# EAGLE board CT_schematic (EAGLE 7.6.0)

Size 100 x 80 mm. Coordinates in mm from the lower left corner, seen from the top.
Outline: 0,0 100,0 100,80 0,80 0,0
Copper layers (1*16): Top 0.035mm / dielectric 1.5mm / Bottom 0.035mm
Design rules "default": minimum track width 10mil, minimum drill 24mil, track to track 8mil, track to pad 8mil, pad to pad 8mil, via to via 8mil, smd to smd 8mil, copper to edge 40mil, drill to drill 8mil, minimum pad ring 10mil, minimum via ring 8mil, stop-mask expansion 4mil, vias tented up to drill 0mil, thermal gap 10mil

## Footprints (pad centres in the part's own frame; a part is rotated, then mirrored left to right if it is on the bottom)
C0603 = smd 0.8 x 0.8: 1 -0.762,0; 2 0.762,0
C0402 = smd 0.5 x 0.5: 1 -0.508,0; 2 0.508,0
C0805 = smd 1.2 x 1.3: 1 -1.016,0; 2 1.016,0
EXV-9B = smd 2.718 x 1.778: 1 -2.108,0; 2 2.108,0
C1206 = smd 1.3 x 1.6: 1 -1.524,0; 2 1.524,0
C1210 = smd 1.2 x 2.5: 1 -1.524,0; 2 1.524,0
EXV-9H = smd 3.505 x 1.676: 1 -2.857,0; 2 2.857,0
PJ-037B_PACKAGE = drill 3.7 square: 1 12,0 | drill 3.2 square: 2 6,0
R0603 = smd 0.8 x 0.8: 1 -0.762,0; 2 0.762,0
WLCSP49 = smd 0.25 x 0.25: A1 -1.2,1.2; A2 -0.8,1.2; A3 -0.4,1.2; A4 0,1.2; A5 0.4,1.2; A6 0.8,1.2; A7 1.2,1.2; B1 -1.2,0.8; B2 -0.8,0.8; B3 -0.4,0.8; B4 0,0.8; B5 0.4,0.8; B6 0.8,0.8; B7 1.2,0.8; C1 -1.2,0.4; C2 -0.8,0.4; C3 -0.4,0.4; C4 0,0.4; C5 0.4,0.4; C6 0.8,0.4; C7 1.2,0.4; D1 -1.2,0; D2 -0.8,0; D3 -0.4,0; D4 0,0; D5 0.4,0; D6 0.8,0; D7 1.2,0; E1 -1.2,-0.4; E2 -0.8,-0.4; E3 -0.4,-0.4; E4 0,-0.4; E5 0.4,-0.4; E6 0.8,-0.4; E7 1.2,-0.4; F1 -1.2,-0.8; F2 -0.8,-0.8; F3 -0.4,-0.8; F4 0,-0.8; F5 0.4,-0.8; F6 0.8,-0.8; F7 1.2,-0.8; G1 -1.2,-1.2; G2 -0.8,-1.2; G3 -0.4,-1.2; G4 0,-1.2; G5 0.4,-1.2; G6 0.8,-1.2; G7 1.2,-1.2
SSOP-28 = smd 1.5 x 0.4: 1 -3.625,4.225; 2 -3.625,3.575; 3 -3.625,2.925; 4 -3.625,2.275; 5 -3.625,1.625; 6 -3.625,0.975; 7 -3.625,0.325; 8 -3.625,-0.325; 9 -3.625,-0.975; 10 -3.625,-1.625; 11 -3.625,-2.275; 12 -3.625,-2.925; 13 -3.625,-3.575; 14 -3.625,-4.225; 15 3.625,-4.225; 16 3.625,-3.575; 17 3.625,-2.925; 18 3.625,-2.275; 19 3.625,-1.625; 20 3.625,-0.975; 21 3.625,-0.325; 22 3.625,0.325; 23 3.625,0.975; 24 3.625,1.625; 25 3.625,2.275; 26 3.625,2.925; 27 3.625,3.575; 28 3.625,4.225
FCI_10118193-0001LF = smd 0.4 x 1.35: 1 -1.3,2.675; 2 -0.65,2.675; 3 0,2.675; 4 0.65,2.675; 5 1.3,2.675 | smd 1.6 x 1.4: 6 -3.2,2.45; 7 3.2,2.45 | smd 1.9 x 1.9: 8 -1.2,0; 9 1.2,0 | hole 0.5: -3.3,0; 3.3,0
SAMTEC_FTSH-105-01-L-DV-K = smd 0.762 x 2.794: 1 -2.54,-2.032; 2 -2.54,2.032; 3 -1.27,-2.032; 4 -1.27,2.032; 5 0,-2.032; 6 0,2.032; 7 1.27,-2.032; 8 1.27,2.032; 9 2.54,-2.032; 10 2.54,2.032
WFDN-8 = smd 0.48 x 0.7: 1 0,0; 2 1.27,0; 3 2.54,0; 4 3.81,0; 5 3.81,4.45; 6 2.54,4.45; 7 1.27,4.45; 8 0,4.45 | smd 4 x 3: 9 1.89,2.25
VQFN-16 = smd 1.105 x 0.381: 1 -1.822,0.975; 2 -1.822,0.325; 3 -1.822,-0.325; 4 -1.822,-0.975; 9 1.822,-0.975; 10 1.822,-0.325; 11 1.822,0.325; 12 1.822,0.975 | smd 0.381 x 1.105: 5 -0.975,-1.822; 6 -0.325,-1.822; 7 0.325,-1.822; 8 0.975,-1.822; 13 0.975,1.822; 14 0.325,1.822; 15 -0.325,1.822; 16 -0.975,1.822
HTSS-105-01-G-D = drill 1 pad 1.8 square: 1 0,0 | drill 1 pad 1.8: 2 0,2.54; 3 2.54,0; 4 2.54,2.54; 5 5.08,0; 6 5.08,2.54; 7 7.62,0; 8 7.62,2.54; 9 10.16,0; 10 10.16,2.54
ABS07-32.768KHZ-7-T = smd 1.1 x 2.4: 1 -2.5,0; 2 0,0
ABLS-25.000MHZ-B2F-T = smd 5.6 x 2.8: 1 -3.81,0; 2 5.69,0
ABLS-12.000MHZ-B4-T = smd 5.6 x 2.8: 1 0,0; 2 9.5,0
LP2954 = smd 1.6 x 0.6: 1 -2.475,1.905 | smd 1.55 x 0.6: 2 -2.475,0.635; 3 -2.475,-0.635; 4 -2.475,-1.905; 5 2.475,-1.905; 6 2.475,-0.635; 7 2.475,0.635; 8 2.475,1.905
WSON-8 = smd 0.3 x 0.6: 1 -0.75,0; 2 0.05,0; 3 0.85,0; 4 1.65,0; 5 1.65,3.8; 6 0.85,3.8; 7 0.05,3.8; 8 -0.75,3.8 | smd 3 x 2.6: PAD 0.45,1.9
SON-6 = smd 0.55 x 0.3: 1 -0.355,0.5 | smd 0.52 x 0.3: 2 -0.37,0; 3 -0.37,-0.5; 4 0.37,-0.5; 5 0.37,0; 6 0.37,0.5
SW_4-1437565-2 = smd 1.4 x 2.1: 1 -2.23,4.55; 2 -2.23,-4.55; 3 2.23,4.55; 4 2.23,-4.55
LGM67K-G1J2-24-Z = smd 0.8 x 1.4: A -2,0; C 0,0
NC7SZ125M5X = smd 1.3 x 0.7: 1 -1.3,0.95; 2 -1.3,0; 3 -1.3,-0.95; 4 1.3,-0.95; 5 1.3,0.95
DUMMY_PACKAGE_172 = drill 0.3: 1 0,-1; 2 1.5,-1; 3 3,-1

## Placement (x,y rotation side)
C1  1e-06  [C0603]  -53.34,67.31 0 top  (outside the outline)
C2  1e-07  [C0603]  -57.15,67.31 0 top  (outside the outline)
C3  1e-07  [C0603]  -60.96,67.31 0 top  (outside the outline)
C4  1e-07  [C0603]  -64.77,67.31 0 top  (outside the outline)
C5  1e-07  [C0603]  -68.58,67.31 0 top  (outside the outline)
C6  1e-07  [C0603]  -72.39,67.31 0 top  (outside the outline)
C7  4.7e-06  [C0603]  -49.53,67.31 0 top  (outside the outline)
C8  1e-08  [C0603]  -15.24,72.39 0 top  (outside the outline)
C9  1e-06  [C0603]  -19.05,72.39 0 top  (outside the outline)
C10  1e-07  [C0603]  -22.86,72.39 0 top  (outside the outline)
C11  1e-11  [C0402]  -57.15,72.39 0 top  (outside the outline)
C12  1e-11  [C0402]  -60.96,72.39 0 top  (outside the outline)
C13  1e-11  [C0402]  -64.77,72.39 0 top  (outside the outline)
C14  1e-11  [C0402]  -68.58,72.39 0 top  (outside the outline)
C15  1e-07  [C0402]  -72.39,72.39 0 top  (outside the outline)
C16  4.7e-06  [C0805]  -54.61,55.88 0 top  (outside the outline)
C17  1e-07  [C0402]  -15.24,77.47 0 top  (outside the outline)
C18  1e-07  [C0402]  -19.05,77.47 0 top  (outside the outline)
C19  1e-07  [C0402]  -22.86,77.47 0 top  (outside the outline)
C20  1e-07  [C0402]  -26.67,77.47 0 top  (outside the outline)
C21  1e-07  [C0402]  -30.48,77.47 0 top  (outside the outline)
C22  1e-07  [C0402]  -34.29,77.47 0 top  (outside the outline)
C23  1e-06  [C0603]  -26.67,72.39 0 top  (outside the outline)
C24  1e-06  [EXV-9B]  -25.4,55.88 0 top  (outside the outline)
C25  2.2e-06  [EXV-9B]  -34.29,55.88 0 top  (outside the outline)
C26  1e-08  [C0402]  -38.1,77.47 0 top  (outside the outline)
C27  1e-05  [C1206]  -69.85,48.26 0 top  (outside the outline)
C28  1e-05  [C1210]  -63.5,49.53 0 top  (outside the outline)
C29  1e-07  [C0402]  -41.91,77.47 0 top  (outside the outline)
C30  0.0001  [EXV-9H]  -64.77,31.75 0 top  (outside the outline)
C31  0.0001  [EXV-9H]  -17.78,41.91 0 top  (outside the outline)
C32  1e-08  [C0402]  -45.72,77.47 0 top  (outside the outline)
C33  1e-08  [C0402]  -49.53,77.47 0 top  (outside the outline)
J1  PJ-037B  [PJ-037B_PACKAGE]  -71.12,7.62 0 top  (outside the outline)
R1  10000.0  [R0603]  -40.64,62.23 0 top  (outside the outline)
R2  1000.0  [R0603]  -30.48,72.39 0 top  (outside the outline)
R3  910.0  [R0603]  -34.29,72.39 0 top  (outside the outline)
R4  4700.0  [R0603]  -38.1,72.39 0 top  (outside the outline)
R5  10000.0  [R0603]  -45.72,62.23 0 top  (outside the outline)
R6  4700.0  [R0603]  -41.91,72.39 0 top  (outside the outline)
R7  10000.0  [R0603]  -50.8,62.23 0 top  (outside the outline)
R8  10000.0  [R0603]  -55.88,62.23 0 top  (outside the outline)
R9  10000.0  [R0603]  -60.96,62.23 0 top  (outside the outline)
R10  10000.0  [R0603]  -66.04,62.23 0 top  (outside the outline)
R11  10000.0  [R0603]  -71.12,62.23 0 top  (outside the outline)
R12  10000.0  [R0603]  -15.24,67.31 0 top  (outside the outline)
R13  5.0  [R0603]  -45.72,72.39 0 top  (outside the outline)
R14  100000.0  [R0603]  -59.69,55.88 0 top  (outside the outline)
R15  100000.0  [R0603]  -64.77,55.88 0 top  (outside the outline)
R16  100000.0  [R0603]  -69.85,55.88 0 top  (outside the outline)
R17  10000.0  [R0603]  -20.32,67.31 0 top  (outside the outline)
R18  10000.0  [R0603]  -25.4,67.31 0 top  (outside the outline)
R19  100000.0  [R0603]  -74.93,55.88 0 top  (outside the outline)
R20  100000.0  [R0603]  -15.24,62.23 0 top  (outside the outline)
R21  47000.0  [R0603]  -30.48,67.31 0 top  (outside the outline)
R22  100000.0  [R0603]  -20.32,62.23 0 top  (outside the outline)
R23  100000.0  [R0603]  -25.4,62.23 0 top  (outside the outline)
R24  2231.0  [R0603]  -49.53,72.39 0 top  (outside the outline)
R25  1000.0  [R0603]  -53.34,72.39 0 top  (outside the outline)
R26  10000.0  [R0603]  -35.56,67.31 0 top  (outside the outline)
R27  10000.0  [R0603]  -40.64,67.31 0 top  (outside the outline)
R28  82000.0  [R0603]  -45.72,67.31 0 top  (outside the outline)
R29  300000.0  [R0603]  -30.48,62.23 0 top  (outside the outline)
R30  120000.0  [R0603]  -35.56,62.23 0 top  (outside the outline)
U1  STM32L433CBY6  [WLCSP49]  -24.13,49.53 0 top  (outside the outline)
U2  FT232RL-REEL  [SSOP-28]  -20.32,7.62 0 top  (outside the outline)
U3  10118193-0001LF  [FCI_10118193-0001LF]  -54.61,31.75 0 top  (outside the outline)
U4  FTSH-105-01-L-DV-K  [SAMTEC_FTSH-105-01-L-DV-K]  -49.53,7.62 0 top  (outside the outline)
U5  SST26WF016B-104I/MF  [WFDN-8]  -50.8,19.05 0 top  (outside the outline)
U6  TSC2046IRGVR  [VQFN-16]  -16.51,55.88 0 top  (outside the outline)
U7  HTSS-105-01-G-D  [HTSS-105-01-G-D]  -67.31,19.05 0 top  (outside the outline)
U8  ABS07-32.768KHZ-7-T  [ABS07-32.768KHZ-7-T]  -43.18,49.53 0 top  (outside the outline)
U9  ABLS-25.000MHZ-B2F-T  [ABLS-25.000MHZ-B2F-T]  -36.83,41.91 0 top  (outside the outline)
U10  ABLS-12.000MHZ-B4-T  [ABLS-12.000MHZ-B4-T]  -60.96,41.91 0 top  (outside the outline)
U11  LP2954AIMX/NOPB  [LP2954]  -25.4,33.02 0 top  (outside the outline)
U12  LP3878SDX-ADJ/NOPB  [WSON-8]  -46.99,30.48 0 top  (outside the outline)
U13  TPS3895ADRYR  [SON-6]  -58.42,76.2 0 top  (outside the outline)
U14  4-1437565-2  [SW_4-1437565-2]  -27.94,21.59 0 top  (outside the outline)
U15  Q65110A2395  [LGM67K-G1J2-24-Z]  -52.07,49.53 0 top  (outside the outline)
U16  nc7sz125m5x  [NC7SZ125M5X]  -41.91,55.88 0 top  (outside the outline)
U17  nc7sz125m5x  [NC7SZ125M5X]  -48.26,55.88 0 top  (outside the outline)
U18  Dummy  [DUMMY_PACKAGE_172]  -55.88,77.47 0 top  (outside the outline)

## Library data of the parts
C1-C33 J1 R1-R30 U1-U18 = circuit_tree

## Nets
CLK_CRYSTAL_U1_C6: C11.1 U1.C6 U8.1
CLK_CRYSTAL_U1_C7: C12.1 U1.C7 U8.2
CLK_CRYSTAL_U1_D6: C13.1 U1.D6 U9.1
CLK_CRYSTAL_U1_D7: C14.1 U1.D7 U9.2
CLK_CRYSTAL_U2_27: U2.27 U10.1
CLK_CRYSTAL_U2_28: U2.28 U10.2
GND: C1.2 C2.2 C3.2 C4.2 C5.2 C6.2 C7.2 C8.2 C9.2 C10.2 C11.2 C12.2 C13.2 C14.2 C15.2 C16.2 C17.2 C18.2 C19.2 C20.2 C21.2 C22.2 C23.2 C24.2 C25.2 C26.2 C27.2 C28.2 C29.2 C30.2 C31.2 C32.2 C33.2 J1.2 R2.2 R5.2 R8.2 R12.2 R13.2 R22.2 R25.2 R28.2 R30.2 U1.A6 U1.B1 U1.E7 U1.G2 U2.7 U2.18 U2.21 U2.25 U2.26 U3.5 U3.6 U3.7 U3.8 U3.9 U4.3 U4.5 U5.4 U5.9 U6.10 U7.9 U11.4 U12.3 U12.PAD U13.2 U15.C U16.2 U16.3 U17.1 U17.3 U18.1
NET_U1_A5: R5.1 U1.A5
NET_U1_D5: R4.1 U1.D5 U17.4
NET_U1_G3: R3.1 U1.G3 U15.A
NET_U1_G7: R1.1 U1.G7 U14.3 U14.4
NET_U2_14: R7.1 U2.14
NET_U2_17: C17.1 U2.17
NET_U2_19: R8.1 U2.19
NET_U3_1: R6.1 U3.1
NET_U3_2: U2.16 U3.2
NET_U3_3: U2.15 U3.3
NET_U3_19: R6.2
NET_U4_9: R13.1 U4.9
NET_U6_15: R18.1 U6.15
NET_U7_3: U6.7 U7.3
NET_U7_4: U6.9 U7.4
NET_U7_5: U6.6 U7.5
NET_U7_6: U6.8 U7.6
NET_U11_3: R20.1 U11.3
NET_U11_5: R19.1 U11.5
NET_U11_7: R21.2 R22.1 U11.7
NET_U12_1: C26.1 U12.1
NET_U12_6: R24.2 R25.1 U12.6
NET_U12_8: R23.1 U12.8
NET_U13_1: R27.1 R28.1 U13.1
NET_U13_3: R29.2 R30.1 U13.3
NET_U13_4: R26.1 U13.4 U16.4 U17.2
NET_U14_1: R2.1 U14.1 U14.2
PROC_LPUART1_CTS: U1.E2 U2.3
PROC_LPUART1_RTS: U1.F1 U2.11
PROC_LPUART1_RX: U1.E4 U2.1
PROC_LPUART1_TX: U1.F2 U2.5
PROC_QUADSPI_BK1_IO0: U1.G4 U5.5
PROC_QUADSPI_BK1_IO1: U1.G5 U5.2
PROC_QUADSPI_BK1_IO2: R15.1 U1.F3 U5.3
PROC_QUADSPI_BK1_IO3: R16.1 U1.F4 U5.7
PROC_QUADSPI_BK1_NCS: R14.1 U1.E5 U5.1
PROC_QUADSPI_CLK: U1.E3 U5.6
PROC_SPI1_MISO: U1.A4 U6.16
PROC_SPI1_MOSI: U1.B4 U6.2
PROC_SPI1_NSS: R17.1 U1.G6 U6.3
PROC_SPI1_SCK: U1.F5 U6.4
PROC_SYS_JTCK_SWCLK: R12.1 U1.A2 U4.4
PROC_SYS_JTDI: R10.1 U1.B3 U4.8
PROC_SYS_JTDO_SWO: U1.A3 U4.6
PROC_SYS_JTMS_SWDIO: R11.1 U1.B2 U4.2
PROC_TIM1_CH2: U1.D2 U18.2
PROC_TIM1_CH4: U1.C1 U18.3
RST_OUT_U4_JTAG_RST_B: R9.1 U4.10 U16.1
VCC_S1_8V5: C24.1 C27.1 C30.1 C31.1 J1.1 R20.2 R23.2 U11.8 U12.4
VCC_TIER1_1V8: C1.1 C2.1 C3.1 C4.1 C5.1 C6.1 C7.1 C8.1 C9.1 C10.1 C18.1 C19.1 C20.1 C21.1 C25.1 C29.1 C32.1 C33.1 R1.2 R3.2 R4.2 R9.2 R10.2 R11.2 R14.2 R15.2 R16.2 R17.2 R18.2 R19.2 R21.1 R26.2 R27.2 R29.1 U1.A1 U1.A7 U1.B6 U1.F7 U1.G1 U2.4 U4.1 U5.8 U6.14 U11.1 U13.6 U16.5 U17.5
VCC_TIER1_3V3: C15.1 C16.1 C22.1 C23.1 C28.1 R7.2 R24.1 U2.20 U6.5 U12.5

## Tracks (layer width: path | path; a pad name or v marks a point on that pad's centre or on a via)
CLK_CRYSTAL_U1_C6  (2 unrouted)
CLK_CRYSTAL_U1_C7  (2 unrouted)
CLK_CRYSTAL_U1_D6  (2 unrouted)
CLK_CRYSTAL_U1_D7  (2 unrouted)
CLK_CRYSTAL_U2_27  (1 unrouted)
CLK_CRYSTAL_U2_28  (1 unrouted)
GND  (72 unrouted)
NET_U1_A5  (1 unrouted)
NET_U1_D5  (2 unrouted)
NET_U1_G3  (2 unrouted)
NET_U1_G7  (3 unrouted)
NET_U2_14  (1 unrouted)
NET_U2_17  (1 unrouted)
NET_U2_19  (1 unrouted)
NET_U3_1  (1 unrouted)
NET_U3_2  (1 unrouted)
NET_U3_3  (1 unrouted)
NET_U4_9  (1 unrouted)
NET_U6_15  (1 unrouted)
NET_U7_3  (1 unrouted)
NET_U7_4  (1 unrouted)
NET_U7_5  (1 unrouted)
NET_U7_6  (1 unrouted)
NET_U11_3  (1 unrouted)
NET_U11_5  (1 unrouted)
NET_U11_7  (2 unrouted)
NET_U12_1  (1 unrouted)
NET_U12_6  (2 unrouted)
NET_U12_8  (1 unrouted)
NET_U13_1  (2 unrouted)
NET_U13_3  (2 unrouted)
NET_U13_4  (3 unrouted)
NET_U14_1  (2 unrouted)
PROC_LPUART1_CTS  (1 unrouted)
PROC_LPUART1_RTS  (1 unrouted)
PROC_LPUART1_RX  (1 unrouted)
PROC_LPUART1_TX  (1 unrouted)
PROC_QUADSPI_BK1_IO0  (1 unrouted)
PROC_QUADSPI_BK1_IO1  (1 unrouted)
PROC_QUADSPI_BK1_IO2  (2 unrouted)
PROC_QUADSPI_BK1_IO3  (2 unrouted)
PROC_QUADSPI_BK1_NCS  (2 unrouted)
PROC_QUADSPI_CLK  (1 unrouted)
PROC_SPI1_MISO  (1 unrouted)
PROC_SPI1_MOSI  (1 unrouted)
PROC_SPI1_NSS  (2 unrouted)
PROC_SPI1_SCK  (1 unrouted)
PROC_SYS_JTCK_SWCLK  (2 unrouted)
PROC_SYS_JTDI  (2 unrouted)
PROC_SYS_JTDO_SWO  (1 unrouted)
PROC_SYS_JTMS_SWDIO  (2 unrouted)
PROC_TIM1_CH2  (1 unrouted)
PROC_TIM1_CH4  (1 unrouted)
RST_OUT_U4_JTAG_RST_B  (2 unrouted)
VCC_S1_8V5  (8 unrouted)
VCC_TIER1_1V8  (46 unrouted)
VCC_TIER1_3V3  (9 unrouted)